# Altium PCB TouchSlider_ESP32_CAP1208.PcbDoc
Units mil, origin at the board's own origin, x right, y up, seen from the top; angles counter-clockwise.
Board outline 2000 x 900 mil, 2 copper layers (Top Layer, Bottom Layer), stack 65.792 mil thick; 26 components, 28 nets, 125 pads, 47 vias.
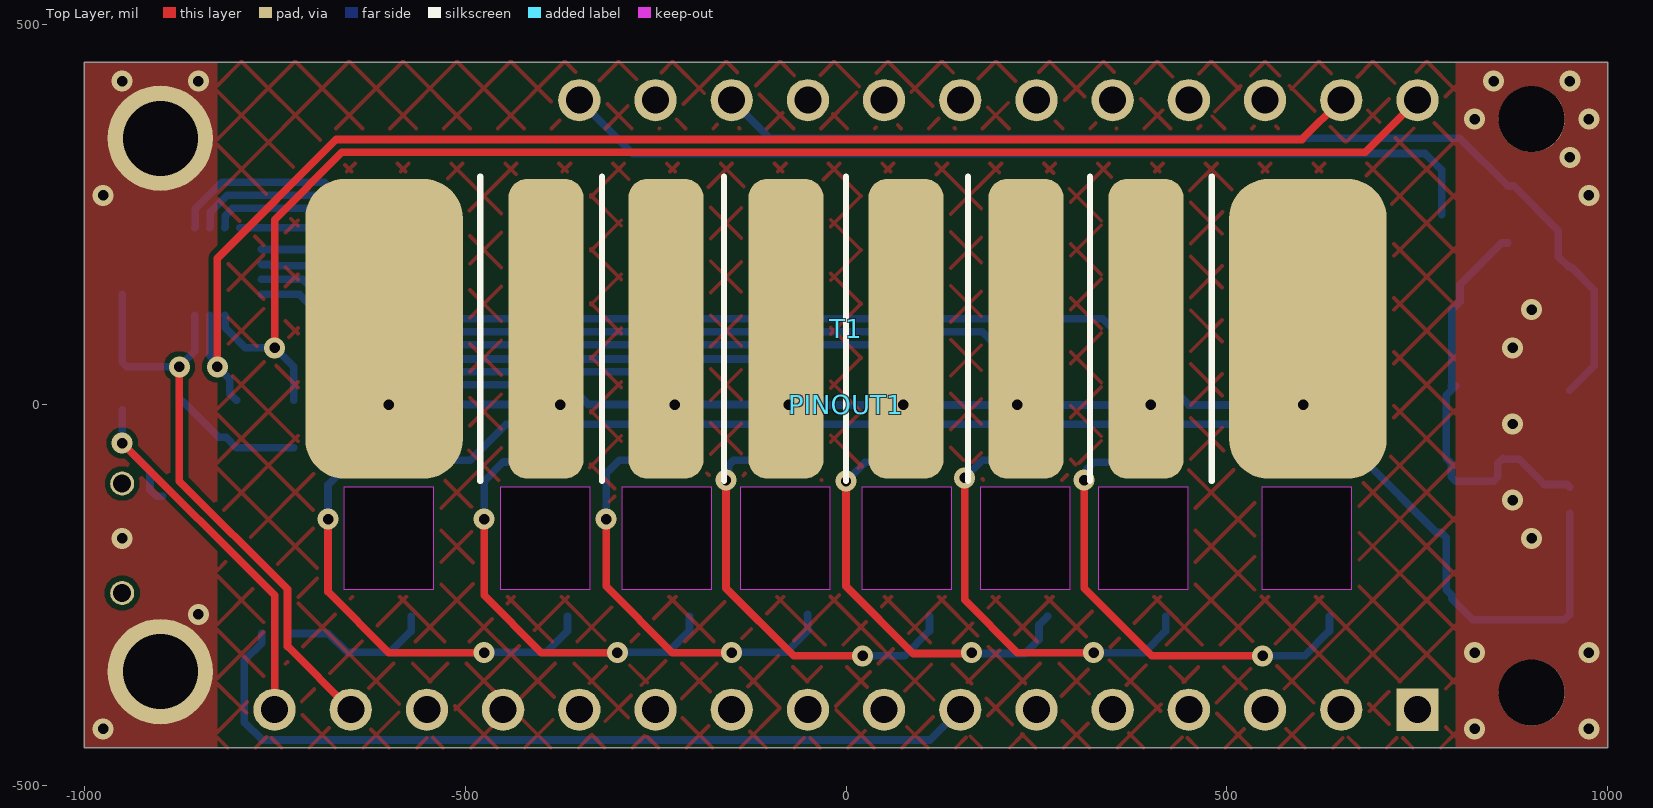
[diagram p0: Top Layer view]
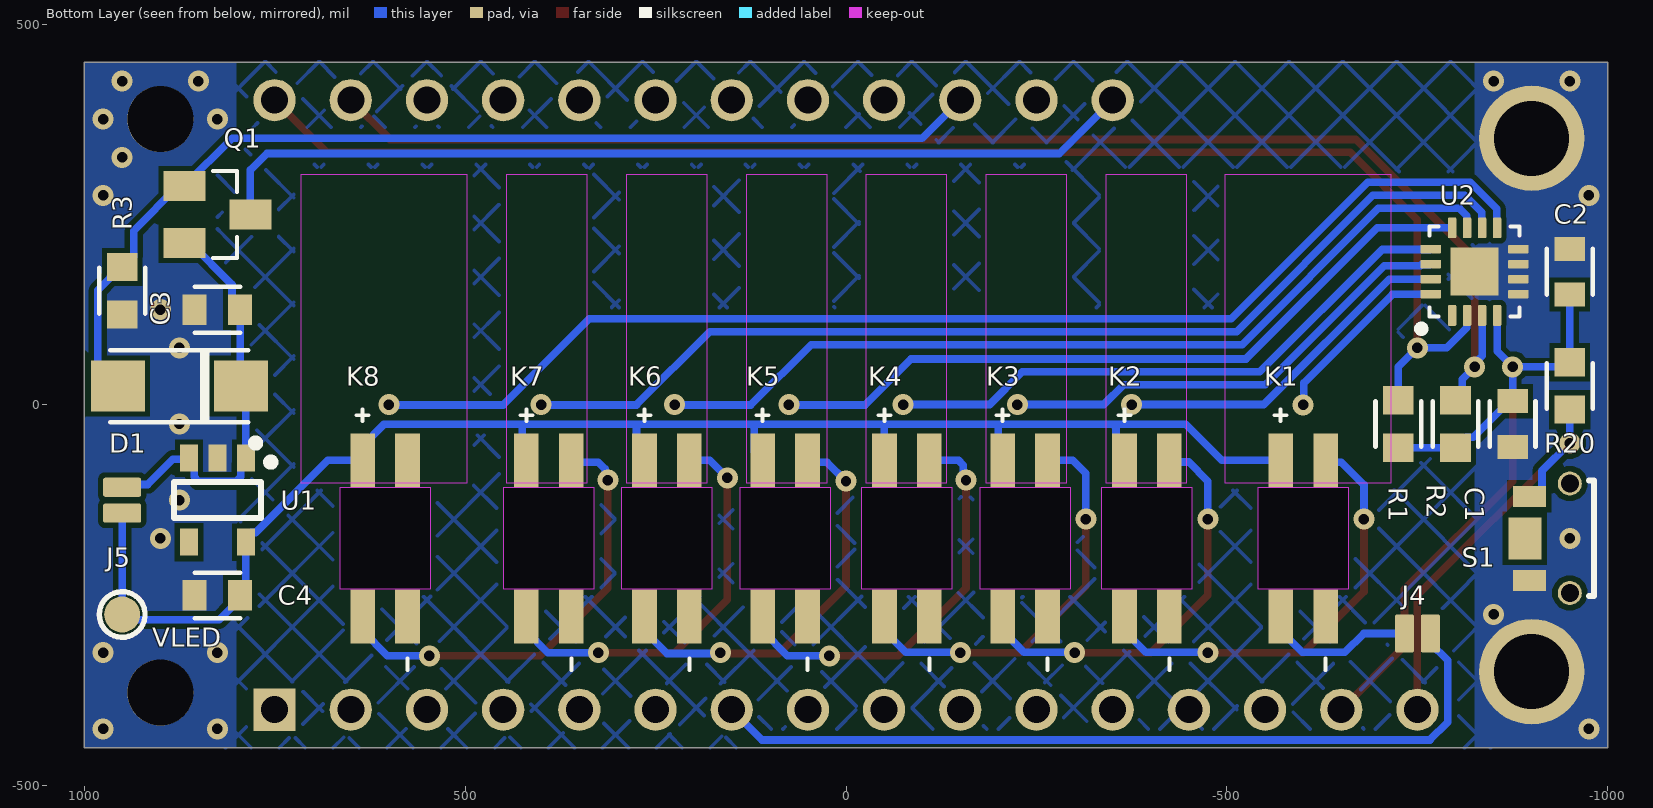
[diagram p1: Bottom Layer view, seen from below]
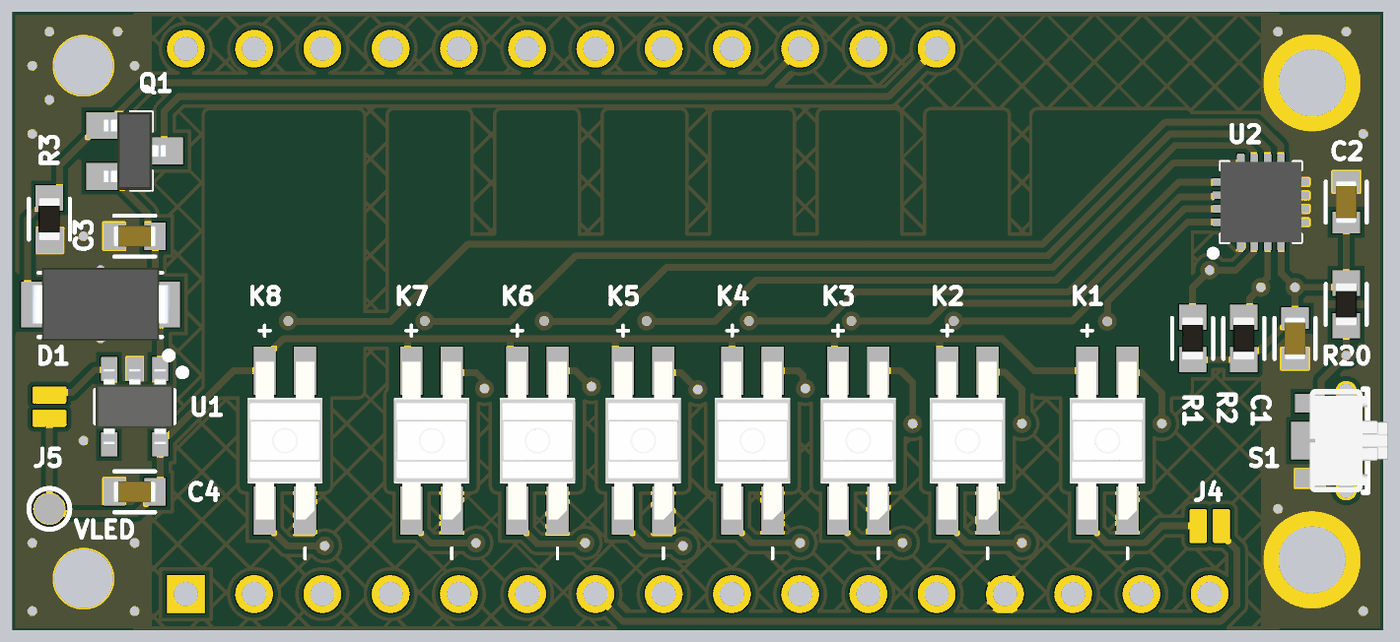
[diagram p2: 3D render of the assembled board from below, using the file's embedded part models]

## Layer stack, top to bottom
Top Solder: solder mask 0.4, Solder Resist, Dk 3.5
Top Layer: signal copper 1.4
Dielectric 1: dielectric 62.9921, FR-4, Dk 4.8
Bottom Layer: signal copper 1.4
Bottom Solder: solder mask 0.4, Solder Resist, Dk 3.5

## Board outline
-1000,-450 1000,-450 1000,450 -1000,450

## Design rules (kind name [scope] priority, off if disabled: settings)
Clearance Clearance_RF [InNetClass('RF')] p1: gap=6 ignorepadtopadclearanceinfootprint=TRUE
Clearance [All] p2: gap=7 ignorepadtopadclearanceinfootprint=TRUE except(0: SMDPad-Hole)
ComponentClearance [All] p1: gap=10 collisioncheckmode=3 verticalgap=10 showdistances=FALSE donotcheckwithout3dbody=TRUE
HoleSize [All] p1: absolutevalues=TRUE maxlimit=200 minlimit=1 maxpercent=80.000 minpercent=20.000
MinimumSolderMaskSliver [All] p1: minsoldermaskwidth=2
PlaneClearance [All] p1: clearance=40
PlaneConnect [All] p1: pad.planeconnectstyle=Direct pad.reliefexpansion=20 pad.reliefentries=4 pad.reliefconductorwidth=10 pad.reliefairgap=10 via.planeconnectstyle=Relief via.reliefexpansion=20 via.reliefentries=4 via.reliefconductorwidth=10 via.reliefairgap=10
PolygonConnect GND_Planes [InNet('GND') vs InPolygonClass('PLANES')] p1: thpad.connectstyle=Direct thpad.reliefconductorwidth=10 thpad.reliefentries=4 thpad.polygonreliefangle="90 Angle" thpad.airgapwidth=10 smdpad.connectstyle=Relief smdpad.reliefconductorwidth=20 smdpad.reliefentries=4 smdpad.polygonreliefangle="90 Angle" smdpad.airgapwidth=10 via.connectstyle=Direct via.reliefconductorwidth=10 via.reliefentries=4 via.polygonreliefangle="90 Angle" via.airgapwidth=10
PolygonConnect [All] p2: connectstyle=Direct reliefconductorwidth=10 reliefentries=4 polygonreliefangle="90 Angle" airgapwidth=10
RoutingVias [All] p1: holewidth=13.78 width=27.56 viastyle="Through Hole" minholewidth=11.81 minwidth=25.59 maxholewidth=19.68 maxwidth=33.46
ShortCircuit "Schematic Short-Circuit Constraint_3" [InComponent('J5')] p1: allowed=TRUE
ShortCircuit "Schematic Short-Circuit Constraint_1" [InComponent('J4')] p2: allowed=TRUE
ShortCircuit [All] p3: allowed=FALSE
SilkToSilkClearance [All] p1: silktosilkclearance=1
SilkToSolderMaskClearance [IsPad] p1: minsilkscreentomaskgap=1 clearancetoexposedcopper=TRUE
SolderMaskExpansion [All] p1: expansion=2 istentingtop=FALSE
Width Width_RF [InNetClass('RF')] p1: maxlimit=38 minlimit=8 preferedwidth=38
Width [All] p2: maxlimit=40 minlimit=8 preferedwidth=10
22 further rules are at their usual default settings.

## Classes and differential pairs
component class Peripherals: C1 C2 K1 K2 K3 K4 K5 K6 K7 K8 PINOUT1 R1 R2 R20 S1 T1 U2
component class Power_Supplies: C3 C4 D1 J4 J5 Q1 R3 U1 VLED

## Components (designator, comment, footprint, x,y, rotation, side; value= is the part's Value field where it differs from the comment)
C1 "100nF/16V" C0603 -875,-25 r270 bottom
C2 "1uF/16V" C0603 -950,175 r90 bottom
C3 "10uF/10V" C0603 825,125 r0 bottom
C4 "10uF/10V" C0603 825,-250 r0 bottom
D1 "40V/1A" SMA-2 875,25 r0 bottom
J4 "SMD NO" JUMPER_SMD_NO -750,-300 r180 bottom net-tie
J5 "SMD NO" JUMPER_SMD_NO 950,-125 r270 bottom net-tie
K1 "NeoPixel Reverse" SK6812-E -600,-175 r90 bottom
K2 "NeoPixel Reverse" SK6812-E -395,-175 r90 bottom
K3 "NeoPixel Reverse" SK6812-E -235,-175 r90 bottom
K4 "NeoPixel Reverse" SK6812-E -80,-175 r90 bottom
K5 "NeoPixel Reverse" SK6812-E 80,-175 r90 bottom
K6 "NeoPixel Reverse" SK6812-E 235,-175 r90 bottom
K7 "NeoPixel Reverse" SK6812-E 390,-175 r90 bottom
K8 "NeoPixel Reverse" SK6812-E 605,-175 r90 bottom
PINOUT1 "Pinout_FeatherESP32" Pinout_FeatherESP32 0,0 r0 top locked
Q1 "1.5A/30V/2V" SOT-23-3 825,250 r270 bottom
R1 "10K" R0603 -725,-25 r90 bottom value=10kR
R2 "10K" R0603 -800,-25 r270 bottom value=10kR
R3 "100K" R0603 950,150 r270 bottom
R20 "100K" R0603 -950,25 r90 bottom
S1 "TL6340AF160Q 0.8mm" TL6340AF160Q -950,-175 r270 bottom
T1 "TOUCH SLIDER 8RECT" "TOUCH SLIDER 8-RECT KEPOUT" 0,100 r90 top locked
U1 "AP2112K-3.3TRG1" SOT-25-5 825,-125 r270 bottom
U2 "CAP1208" QFN16 -825,175 r90 bottom
VLED "Test point 1.2mm" TEST_POINT_1.2MM 950,-275 r90 bottom

## Footprints (in the part's own frame and the unit in brackets; to place one, negate y for a bottom-side part, rotate by r counter-clockwise, add the part's x,y. Pads: shape width x height; smd on the part's side, far side on the other; paste and mask are expansions set on the pad)
C0603 [mm]
  rect 0.8x1.02 smd: 1(-0.759,0) 2(0.759,0)
  silkscreen extent -0.76,-0.76 0.76,0.76, body extent -0.8,-0.4 0.8,0.4, height 0.81
JUMPER_SMD_NO [mil]
  rrect20% 25x50 smd paste-99999: 1(-17,0) 2(17,0)
Pinout_FeatherESP32 [mm]
  rect 1.408x1.408 hole 0.9: 1(19.05,-10.16)
  round 1.408 hole 0.9: 2(16.51,-10.16) 3(13.97,-10.16) 4(11.43,-10.16) 5(8.89,-10.16) 6(6.35,-10.16) 7(3.81,-10.16) 8(1.27,-10.16) 9(-1.27,-10.16) 10(-3.81,-10.16) 11(-6.35,-10.16) 12(-8.89,-10.16) 13(-11.43,-10.16) 14(-13.97,-10.16) 15(-16.51,-10.16) 16(-19.05,-10.16) 17(-8.89,10.16) 18(-6.35,10.16) 19(-3.81,10.16) 20(-1.27,10.16) 21(1.27,10.16) 22(3.81,10.16) 23(6.35,10.16) 24(8.89,10.16) 25(11.43,10.16) 26(13.97,10.16) 27(16.51,10.16) 28(19.05,10.16)
  round 3.516 hole 2.5: P1(-22.86,-8.89) P2(-22.86,8.89)
  round 2.2 hole 2.2 unplated: ""(22.86,-9.588) ""(22.86,9.525)
QFN16 [mm] "QFN16 3x3mm"
  rrect25% 0.69x0.28 smd: 1(-1.46,0.75) 2(-1.46,0.25) 3(-1.46,-0.25) 4(-1.46,-0.75) 9(1.46,-0.75) 10(1.46,-0.25) 11(1.46,0.25) 12(1.46,0.75)
  rrect25% 0.28x0.69 smd: 5(-0.75,-1.46) 6(-0.25,-1.46) 7(0.25,-1.46) 8(0.75,-1.46) 13(0.75,1.46) 14(0.25,1.46) 15(-0.25,1.46) 16(-0.75,1.46)
  rect 1.6x1.6 smd paste-0.2: 17(0,0)
  silkscreen extent -2.02,-1.5 1.5,1.9, body extent -1.5,-1.5 1.5,1.5, height 0.76
R0603 [mm]
  rect 0.94x1.02 smd: 1(-0.79,0) 2(0.79,0)
  silkscreen extent -0.76,-0.76 0.76,0.76, body extent -0.8,-0.4 0.8,0.4, height 0.51
SK6812-E [mm]
  rect 1.8x0.82 smd: 1(2.6,0.75) 2(2.6,-0.75) 3(-2.6,-0.75) 4(-2.6,0.75)
  Keep-Out Layer board cut-out: 1.7,1.5 1.7,-1.5 -1.7,-1.5 -1.7,1.5
  silkscreen extent -4.4,-0.75 4.3,0.95, body extent -2.94,-1.41 2.94,1.39, height 0.95
SMA-2 [mm]
  rect 1.8x1.7 smd: A(2.05,0) K(-2.05,0)
  silkscreen extent -2.67,-1.18 2.31,2.03, body extent -2.6,-1.36 2.6,1.36, height 2.5
SOT-23-3 [mm]
  rect 1x1.4 smd: 1(-0.95,-1.1) 2(0.95,-1.1) 3(0,1.1)
  silkscreen extent -1.45,-0.15 1.45,0.65, body extent -1.45,-1.15 1.45,1.15, height 1.1
SOT-25-5 [mm] "SOT-23-8 Thin, TSOT-23-8"
  rect 0.9x0.6 smd: 1(-1.4,0.95) 2(-1.4,0) 3(-1.4,-0.95) 4(1.4,-0.95) 5(1.4,0.95)
  silkscreen extent -1.4,-1.45 0.6,1.9, body extent -1.4,-1.45 1.4,1.45, height 1.3
TEST_POINT_1.2MM [mm]
  round 1.2 smd paste-0.025: 1(0,0)
  silkscreen extent -0.76,-0.76 0.76,0.76
TL6340AF160Q [mm]
  rect 0.7x1.1 smd: 1(-1.4,-1.35) 2(1.4,-1.35)
  round 0.8 hole 0.6 mask+0: SH1(-1.825,0) SH2(1.825,0)
  rect 1.4x1.1 smd: SH3(0,-1.5)
  silkscreen extent -1.92,0.63 1.92,0.8, body extent -1.92,-1.35 1.92,1.55, height 1.55
"TOUCH SLIDER 8-RECT KEPOUT" [mm]
  rrect50% 10x5.25 smd mask+0.102: 1(0,15.4) 8(0,-15.4)
  rrect50% 10x2.5 smd mask+0.102: 2(0,10) 3(0,6) 4(0,2) 5(0,-2) 6(0,-6) 7(0,-10)
  Bottom Layer keep-out region: -5.144,18.162 -5.144,12.638 5.143,12.638 5.143,18.162
  Bottom Layer keep-out region: -5.144,-12.638 -5.144,-18.163 5.143,-18.163 5.143,-12.638
  Bottom Layer keep-out region: -5.144,11.35 -5.144,8.683 5.143,8.683 5.143,11.35
  Bottom Layer keep-out region: -5.143,-8.65 -5.143,-11.317 5.144,-11.317 5.144,-8.65
  Bottom Layer keep-out region: -5.143,-4.65 -5.143,-7.317 5.144,-7.317 5.143,-4.65
  Bottom Layer keep-out region: -5.144,7.35 -5.143,4.683 5.143,4.683 5.143,7.35
  Bottom Layer keep-out region: -5.143,3.35 -5.143,0.683 5.143,0.683 5.143,3.35
  Bottom Layer keep-out region: -5.143,-0.65 -5.143,-3.317 5.143,-3.317 5.143,-0.65
  silkscreen extent -5.08,-12.19 5.08,12.19

## Part data
C1: library part "C0603 100nF/16V", "MLCC 0603 100nF 16V 10% X5R", Capacitance=100nF, Case Code (Imperial)=0603, Case Code (Metric)=1608, Dielectric=X5R, Manufacturer 1="Kyocera AVX", Manufacturer Part Number 1=0603YD104KAT2A, Max Operating Temperature=85°C, Min Operating Temperature=-55°C, Package Quantity=4000, Supplier Part Number 1=581-0603YD104KAT2A, Tolerance=10%, Voltage Rating=16V, Case/Package=0603, Category="Ceramic Capacitors", Depth=0.81mm, Height=0.9mm, Lead Free="Lead Free", Length=1.6mm, Mount="Surface Mount", Number of Pins=2, Packaging="Tape and Reel", Pricing 1="1=0.26000, 10=0.11400, 50=0.11400, 100=0.09700, 1000=0.05900, 10000=0.04800 (USD)", RoHS=Yes, Stock 1=3315, Supplier 1=Mouser, Termination=SMD/SMT, Thickness=0.035inch, Voltage Rating (DC)=16V, Width=0.81mm
C2: library part "C0603 1uF/16V", "MLCC 0603 1uF 16V 10% X5R", Capacitance=1uF, Case Code (Imperial)=0603, Case Code (Metric)=1608, Dielectric=X5R, Manufacturer 1=Yageo, Manufacturer Part Number 1=CC0603KRX5R7BB105, Max Operating Temperature=85°C, Min Operating Temperature=-55°C, Package Quantity=4000, Resistor Type=Ceramic, Supplier Part Number 1=603-CC603KRX5R7BB105, Tolerance=10%, Voltage Rating=16V, Case/Package=0603, Category="Ceramic Capacitors", Construction=Flat, Depth=0.8mm, Dissipation Factor=7%, Halogen Free="Halogen Free", Height=0.8mm, Lead Free="Lead Free", Length=1.6mm, Mount="Surface Mount", Number of Pins=2, Packaging="Tape and Reel", Pricing 1="1=0.17000, 10=0.09100, 50=0.09100, 100=0.04100, 1000=0.03400, 10000=0.02100 (USD)", Radiation Hardening=No, REACH SVHC=Unknown, RoHS=Yes, RoHS Compliant=Yes, Series=CC, Stock 1=726921, Supplier 1=Mouser, Termination=SMD/SMT, Thickness=0.035inch, Voltage Rating (DC)=16V, Width=0.8mm
C3 C4: library part "C0603 10uF/10V", "MLCC 10uF 10V X5R 20% 0603", Manufacturer=Samsung, Manufacturer Part Number=CL10A106MP8NNND, Supplier Part Number 1=187-CL10A106MP8NNND, Category="Ceramic Capacitors", Pricing 1="1=0.20000, 10=0.14000, 50=0.14000, 100=0.06600, 1000=0.03900, 10000=0.03000 (USD)", RoHS=Yes, RoHS Compliant=Yes, Stock 1=58774, Supplier 1=Mouser, Supplier 2=Mouser, Supplier Part Number 2=963-LMK107BBJ106MAHT
D1: library part SS14, "SS14 Series 500 mV 1 A 40 V Max Reverse Voltage Schottky Rectifier - DO-214AC", Average Rectified Current=1A, Case/Package=DO-214AC, Forward Voltage=500mV, Manufacturer="ON Semiconductor / Fairchild", Max Forward Surge Current (Ifsm)=40A, Max Operating Temperature=125°C, Max Repetitive Reverse Voltage (Vrrm)=40V, Max Reverse Current=200uA, Min Operating Temperature=-65°C, Package Quantity=7500, Supplier Part Number 1=512-SS14, Category="Schottky Diodes", ComponentLink1Description=https://datasheet.ciiva.com/4713/ss14-197224-4713938.pdf?src-supplier=Mouser, ComponentLink1URL=https://datasheet.ciiva.com/4713/ss14-197224-4713938.pdf?src-supplier=Mouser, ComponentLink2Description=https://datasheet.ciiva.com/7965/1766303-7965241.pdf?src-supplier=Element14, ComponentLink2URL=https://datasheet.ciiva.com/7965/1766303-7965241.pdf?src-supplier=Element14, ComponentLink3Description=https://datasheet.ciiva.com/22651/1880990-22651980.pdf?src-supplier=Element14, ComponentLink3URL=https://datasheet.ciiva.com/22651/1880990-22651980.pdf?src-supplier=Element14, ComponentLink4Description=https://datasheet.ciiva.com/8303/ss19-8303766.pdf?src-supplier=Avnet, ComponentLink4URL=https://datasheet.ciiva.com/8303/ss19-8303766.pdf?src-supplier=Avnet, ComponentLink5Description=https://datasheet.ciiva.com/910/ss12-910696.pdf?src-supplier=Digikey, ComponentLink5URL=https://datasheet.ciiva.com/910/ss12-910696.pdf?src-supplier=Digikey, ComponentLink6Description=https://datasheet.ciiva.com/910/ss12-910697.pdf?src-supplier=Digikey, ComponentLink6URL=https://datasheet.ciiva.com/910/ss12-910697.pdf?src-supplier=Digikey, ComponentLink7Description=https://datasheet.ciiva.com/910/ss12-910695.pdf?src-supplier=Digikey, ComponentLink7URL=https://datasheet.ciiva.com/910/ss12-910695.pdf?src-supplier=Digikey, Current=1A, Current Rating=1A, Forward Current=1A, Height=2.2mm, Length=4.75mm, Manufacturer Part Number=SS14, Max Reverse Voltage (DC)=40V, Mount="Surface Mount", Number of Pins=2, Output Current=1A, Packaging="Tape and Reel", Peak Non-Repetitive Surge Current=40A, Polarity=Standard, Pricing 1="1=0.37, 10=0.261, 50=0.261, 100=0.117, 1000=0.082, 10000=0.075 (USD)", Radiation Hardening=No, Reach SVHC Compliant=No, RoHS=Yes, RoHS Compliant=Yes, Series=-, Stock 1=331320, Supplier 1=Mouser, Termination=SMD/SMT, Voltage=40V, Voltage Rating (DC)=40V, Weight=0.003739oz, Width=2.95mm
J4 J5: library part JUMPER_SMD_NO, Rule="Short-Circuit Constraint [Short Circuit - Allowed]"
K1 K2 K3 K4 K5 K6 K7 K8: library part SK6812-E, "NeoPixel Reverse Mount RGB LEDs - SK6812-E", Manufacturer 1="Adafruit Industries", Manufacturer Part Number 1=4960, Supplier Part Number 1=485-4960, Pricing 1="1=2.95, 10=2.95, 50=2.95, 100=2.95, 1000=2.95, 10000=2.95 (USD)", RoHS=No, Supplier 1=Mouser, Supplier 2=LCSC, Supplier Part Number 2=C5149201
PINOUT1: "Breadboard, Prepunched Insulating Non-Plated Through Hole (NPTH) 0.100 (2.54mm)", Package=None, Arrow_Electronics-Purchase-URL=https://snapeda.com/shop?store=Arrow+Electronics&id=1260737, Availability=Warning, MF="Keystone Electronics", Mouser-Purchase-URL=https://snapeda.com/shop?store=Mouser&id=1260737, MP=3405, Price=None, SnapEDA_Link=https://www.snapeda.com/parts/3405/Keystone%20Electronics/view-part/1260737/?ref=snap
Q1: library part "MOSFET P-CH 30V/1.5A BSS314", "MOSFET P-Ch -30V -1.5A SOT-23-3", Manufacturer=Infineon, Manufacturer Part Number=BSS314PE, Supplier Part Number 1=726-BSS314PEH6327, Halogen Free="Halogen Free", Number of Pins=3, Packaging="Tape and Reel", Pricing 1="1=0.46000, 10=0.34700, 50=0.34700, 100=0.21700, 500=0.14800, 1000=0.11400, 3000=0.10200, 6000=0.09600, 9000=0.09400, 10000=0.09400 (USD)", RoHS=Yes, RoHS Compliant=Yes, Stock 1=2505, Supplier 1=Mouser, Supplier 2=Mouser, Supplier Part Number 2=726-BSS314PEH6327XTS
R1 R2: library part "R0603 10K", "SMD Chip Resistor, 10 kOhm, ± 1%, 100 mW, 0603 [1608 Metric], Thick Film, Anti-Sulfur", Case Code (Imperial)=0603, Case Code (Metric)=1608, Manufacturer 1=Yageo, Manufacturer Part Number 1=AF0603FR-0710KL, Max Operating Temperature=155°C, Max Power Dissipation=100mW, Min Operating Temperature=-55°C, Package Quantity=1, Supplier Part Number 1=603-AF0603FR-0710KL, Temperature Coefficient=100ppm/°C, Tolerance=1%, Voltage Rating=50V, Case/Package=0603, Category="Chip SMD Resistors", Features="Moisture Resistant,Anti-Sulfur", Height=0.022inch, Lead Free=5697LeadFree, Length=0.063inch, Number of Terminations=2, Packaging="Tape and Reel", Power Rating=100mW, Pricing 3="5000=0.00223, 10000=0.00219, 20000=0.00213 (USD)", RoHS=Yes, RoHS Compliant=Yes, Series=AF, Stock 3=5000, Supplier 1=Mouser, Supplier 2=Mouser, Supplier Part Number 2=667-ERJ-3EKF1002V, Termination=SMD/SMT, Width=0.031inch
R3: library part "R0603 100K", "RES 0603 100K OHM 1% 1/10W", Case Code (Imperial)=0603, Case Code (Metric)=1608, Manufacturer=Yageo, Manufacturer Part Number=RC0603FR-07100KL, Max Operating Temperature=155°C, Min Operating Temperature=-55°C, Power Rating=100mW, Resistance=100kR, Resistor Type="Thick Film", Supplier Part Number 1=603-RC0603FR-07100KL, Temperature Coefficient=100ppm/°C, Tolerance=1%, Voltage Rating=50V, Working Voltage=75V, Case/Package=0603, Category="Chip SMD Resistors", Depth=0.8mm, Height=0.45mm, Lead Free="Lead Free", Length=1.6mm, Military Standard=Not, Number of Pins=2, Number of Terminations=2, Packaging="Tape and Reel", Pricing 1="1=0.10000, 10=0.02100, 100=0.00900, 1000=0.00400, 5000=0.00300, 10000=0.00200 (USD)", REACH SVHC="No SVHC", RoHS=Yes, Stock 1=4536807, Supplier 1=Mouser, Termination=SMD/SMT, Voltage Rating (DC)=50V, Width=0.8mm
R20: library part "R0603 100K", "RES 0603 100K OHM 1% 1/10W", Case Code (Imperial)=0603, Case Code (Metric)=1608, Manufacturer 1=Yageo, Manufacturer Part Number 1=RC0603FR-07100KL, Max Operating Temperature=155°C, Min Operating Temperature=-55°C, Power Rating=100mW, Resistance=100kR, Resistor Type="Thick Film", Supplier Part Number 1=603-RC0603FR-07100KL, Temperature Coefficient=100ppm/°C, Tolerance=1%, Voltage Rating=50V, Working Voltage=75V, Case/Package=0603, Category="Chip SMD Resistors", Depth=0.8mm, Height=0.45mm, Lead Free="Lead Free", Length=1.6mm, Military Standard=Not, Number of Pins=2, Number of Terminations=2, Packaging="Tape and Reel", Pricing 1="1=0.10000, 10=0.02100, 100=0.00900, 1000=0.00400, 5000=0.00300, 10000=0.00200 (USD)", REACH SVHC="No SVHC", RoHS=Yes, Stock 1=4536807, Supplier 1=Mouser, Termination=SMD/SMT, Voltage Rating (DC)=50V, Width=0.8mm
S1: "TACTILE SWITCH, SPST, 0.02A/12VDC, SMD; Product Range: TL6340 Series; Actuator Orientation: Side Actuated; Switch...", Manufacturer=E-Switch, Manufacturer Part Number=TL6340AF160Q, Supplier Part Number 1=612-TL6340AF160QG, Category="Tactile Switches", Parameter 1=$0.36, Pricing 1="1=0.51, 10=0.478, 50=0.478, 100=0.46, 1000=0.36, 10000=0.255 (USD)", RoHS=Yes, Stock 1=2636, Supplier 1=Mouser, Supplier 2=LCSC, Supplier Part Number 2=C4944967
T1: "8-Segment touch slider"
U1: "IC REG LINEAR 3.3V 600MA SOT25", Case/Package=SOT-23-5, Dropout Voltage=250mV, Manufacturer=Diodes, Max Input Voltage=6V, Max Operating Temperature=85°C, Max Output Current=600mA, Min Input Voltage=2.5V, Min Operating Temperature=-40°C, Output Voltage=3.3V, Package Quantity=1, Quiescent Current=55uA, Supplier Part Number 1=621-AP2112K-3.3TRG1, Accuracy=1.5%, Category="Voltage Regulators - Linear", ComponentLink1Description=https://datasheet.ciiva.com/29569/ap2112-29569917.pdf?src-supplier=Digi-Key, ComponentLink1URL=https://datasheet.ciiva.com/29569/ap2112-29569917.pdf?src-supplier=Digi-Key, ComponentLink2Description=https://datasheet.ciiva.com/29569/ap2112-29569918.pdf?src-supplier=Digi-Key, ComponentLink2URL=https://datasheet.ciiva.com/29569/ap2112-29569918.pdf?src-supplier=Digi-Key, ComponentLink3Description=https://datasheet.ciiva.com/29569/ap2112-29569919.pdf?src-supplier=Digi-Key, ComponentLink3URL=https://datasheet.ciiva.com/29569/ap2112-29569919.pdf?src-supplier=Digi-Key, ComponentLink4Description=https://datasheet.ciiva.com/30016/ap2112-30016792.pdf?src-supplier=Avnet, ComponentLink4URL=https://datasheet.ciiva.com/30016/ap2112-30016792.pdf?src-supplier=Avnet, Height=1.3mm, Lead Free="Lead Free", Length=3.1mm, Manufacturer Part Number=AP2112K-3.3TRG1, Mount="Surface Mount", Number of Outputs=1, Number of Pins=5, Number of Regulators=1, Output Current=600mA, Output Type=Fixed, Packaging="Tape and Reel", Polarity=Positive, Pricing 1="1=0.47000, 10=0.31700, 50=0.31700, 100=0.15000, 1000=0.11600, 10000=0.08900 (USD)", RoHS=Yes, RoHS Compliant=Yes, Stock 1=4864, Supplier 1=Mouser, Width=1.7mm
U2: "CAP1208 Series 8-Channel Capacitive Touch Surface Mount Proximity - QFN-16", Case/Package=QFN, Manufacturer=Microchip, Manufacturer Part Number=CAP1208-1-A4-TR, Max Operating Temperature=125°C, Max Supply Voltage=5.5V, Min Operating Temperature=-40°C, Min Supply Voltage=3V, Operating Supply Current=500uA, Operating Supply Voltage=5V, Package Quantity=5000, Supplier Part Number 1=579-CAP1208-1-A4-TR, Category="Touch Screen Controllers", ComponentLink1Description=https://datasheet.ciiva.com/28419/1772686-28419124.pdf?src-supplier=Element14, ComponentLink1URL=https://datasheet.ciiva.com/28419/1772686-28419124.pdf?src-supplier=Element14, ComponentLink2Description=https://datasheet.ciiva.com/29355/filehandler-aspxddocname-en566275-29355120.pdf?src-supplier=Digi-Key, ComponentLink2URL=https://datasheet.ciiva.com/29355/filehandler-aspxddocname-en566275-29355120.pdf?src-supplier=Digi-Key, ComponentLink3Description=https://datasheet.ciiva.com/24141/00001570a-278059-24141215.pdf?src-supplier=Mouser, ComponentLink3URL=https://datasheet.ciiva.com/24141/00001570a-278059-24141215.pdf?src-supplier=Mouser, ComponentLink4Description=https://datasheet.ciiva.com/29895/00001570a-29895445.pdf?src-supplier=Avnet, ComponentLink4URL=https://datasheet.ciiva.com/29895/00001570a-29895445.pdf?src-supplier=Avnet, ComponentLink5Description=https://datasheet.ciiva.com/39123/594000001570b-39123436.pdf?src-supplier=Onlinecomponents.com, ComponentLink5URL=https://datasheet.ciiva.com/39123/594000001570b-39123436.pdf?src-supplier=Onlinecomponents.com, Interface=I2C,SMBus, Length=3mm, Mounting Technology="Surface Mount", Number of Channels=8, Number of Inputs=8, Packaging="Tape and Reel", Pins=16, Pricing 1="1=1.04, 10=1.04, 50=1, 100=0.93, 1000=0.93, 10000=0.929 (USD)", Reach SVHC Compliant=No, RoHS=Yes, RoHS Compliant=Yes, Series=-, Stock 1=19733, Supplier 1=Mouser, Supplier 2=Digi-Key, Supplier Part Number 2=CAP1208-1-A4-TRCT-ND, Supply Current=500uA, Termination=SMD/SMT, Touchscreen=Capacitive, Width=3mm
VLED: library part "Test point", "SMD test point"

## Via types
v1: diameter 27.56, hole 13.78, Top Layer to Bottom Layer, tented both sides, 47 vias

## Nets (pads, with @x,y where several pads share a name; then routed paths per layer and width w, separated by ;. In a path a pad name is that pad's centre, name@x,y a point inside that pad or via, vN(x,y) a via of type N, cw(c..) or ccw(c..) an arc to the next point about the centre after c; other vN are vias at no path point)
3.3V: C1.1 C2.1 PINOUT1.15 R1.1 R2.2 R20.2 U2.4 | length 1006.1
  Top Layer w10: v1(-875,50) -875,-100 -733,-242 -733,-317 PINOUT1.15
  Bottom Layer w10: C2.1 R20.2 -943.9,50 v1(-875,50) ; U2.4 -854.53,70.47 v1(-875,50) ; R1.1 R2.2 -813.5,-42.6 -823.19,-42.6 -870.67,4.88 C1.1 v1(-875,50)
GND: C1.2 C2.2 C3.2 C4.2 K1.3 K2.3 K3.3 K4.3 K5.3 K6.3 K7.3 K8.3 PINOUT1. PINOUT1.13 PINOUT1.P1 PINOUT1.P2 R3.2 S1.2 U1.2 U2.1 U2.5 U2.6 U2.7 U2.8 U2.17
  other v1: -975,-425 825,-425 975,-425 825,-325 975,-325 -850,-275 -950,-175 900,-175 875,-125 875,-25 875,75 900,125 -975,275 975,275 950,325 825,375 975,375 -950,425 -850,425 850,425 950,425
NetJ4_1: J4.1 K1.4 | length 203.7
  Bottom Layer w10: J4.1 -679.36,-300 -654.56,-324.8 -598.61,-324.8 -570.47,-296.65 K1.4
NetJ4_2: J4.2 PINOUT1.7 | length 1091.7
  Bottom Layer w10: J4.2 -767,-312.5 -789.72,-335.22 -789.72,-416.45 -766.45,-439.72 110.28,-439.72 PINOUT1.7
NetK1_2: K1.2 K2.4 | length 582.4
  Top Layer w10: v1(-679.83,-150) -679.83,-245.17 -600,-325 v1(-475,-325)
  Bottom Layer w10: v1(-679.83,-150) -679.83,-104.83 -650,-75 -631.89,-75 K1.2 ; v1(-475,-325) -474.8,-324.8 -393.61,-324.8 -365.47,-296.65 K2.4
NetK2_2: K2.2 K3.4 | length 543.4
  Top Layer w10: v1(-475,-150) -475,-250 -400,-325 v1(-300,-325)
  Bottom Layer w10: v1(-475,-150) -475,-100 -449.81,-74.81 -426.7,-74.81 K2.2 ; v1(-300,-325) -299.8,-324.8 -233.61,-324.8 -205.47,-296.65 K3.4
NetK3_2: K3.2 K4.4 | length 551
  Top Layer w10: v1@-306.06,-150 v1(-314.83,-150) -314.83,-238.12 -227.95,-325 v1(-150,-325)
  Bottom Layer w10: v1(-314.83,-150) -314.83,-89.83 -297.64,-72.64 K3.2 ; v1(-150,-325) -149.8,-324.8 -78.61,-324.8 -50,-296.18 -50,-275 -50.47,-275.47 K4.4
NetK4_2: K4.2 K5.4 | length 546.7
  Top Layer w10: v1(-157.5,-98.5) -157.5,-240.45 -68.65,-329.3 v1(21.71,-329.3)
  Bottom Layer w10: v1(-157.5,-98.5) -154.14,-95.14 -154.14,-79.14 -147.64,-72.64 K4.2 ; v1(21.71,-329.3) 76.88,-329.3 109.53,-296.65 K5.4
NetK5_2: K5.2 K6.4 | length 533.5
  Top Layer w10: v1(0,-100) 0,-237.95 88.31,-326.27 163.73,-326.27 v1(165,-325)
  Bottom Layer w10: v1(0,-100) 25,-75 48.11,-75 K5.2 ; v1(165,-325) 166.27,-326.27 234.91,-326.27 253.39,-307.8 253.39,-288.5 K6.4
NetK6_2: K6.2 K7.4 | length 542.8
  Top Layer w10: v1(155.78,-95.74) 155.78,-255.78 225,-325 v1(325,-325)
  Bottom Layer w10: v1(155.78,-95.74) 178.88,-72.64 K6.2 ; v1(325,-325) 391.18,-325 419.53,-296.65 K7.4
NetK7_2: K7.2 K8.4 | length 598.7
  Top Layer w10: v1(312.5,-98.5) 312.5,-240.45 401.35,-329.3 v1(546.71,-329.3)
  Bottom Layer w10: v1(312.5,-98.5) 315.86,-95.14 315.86,-84.14 325,-75 349.33,-75 351.69,-72.64 K7.2 ; v1(546.71,-329.3) 601.88,-329.3 634.53,-296.65 K8.4
NetPINOUT1_11: PINOUT1.11
NetPINOUT1_12: PINOUT1.12
NetPINOUT1_16: PINOUT1.16 R20.1 S1.1 | length 573.2
  Top Layer w10: v1(-950,-50) -750,-250 PINOUT1.16
  Bottom Layer w10: R20.1 v1(-950,-50) -913.5,-86.5 -913.5,-111.1 -904.72,-119.88 S1.1
NetPINOUT1_27: PINOUT1.27 R2.1 U2.3 | length 1829.1
  Top Layer w10: v1(-825,50) -825,192.24 -668.81,348.43 598.43,348.43 PINOUT1.27
  Bottom Layer w10: U2.3 -834.84,64.59 -825,54.75 v1(-825,50) -808.75,33.75 -808.75,14.85 R2.1
NetPINOUT1_28: PINOUT1.28 R1.2 U2.2 | length 1904.3
  Top Layer w10: v1(-750,75) -750,243.2 -661.77,331.43 681.43,331.43 PINOUT1.28
  Bottom Layer w10: U2.2 -814.65,117.01 -814.65,101.44 -788.21,75 v1(-750,75) -725,50 R1.2
NetT1_1: T1.1 U2.16 | length 244.3
  Bottom Layer w10: U2.16 -717.33,145.47 -600.64,28.78 -600.64,0.64 v1(-600,0)
NetT1_2: T1.2 U2.15 | length 460.7
  Bottom Layer w10: U2.15 -712.97,165.16 -548.39,0.57 v1(-375,0.57)
NetT1_3: T1.3 U2.14 | length 618.8
  Bottom Layer w10: U2.14 -767.01,184.33 -755.79,184.33 -754.13,182.67 -706.44,182.67 -550.13,26.35 -364.32,26.35 -338.54,0.57 v1(-225,0.57)
NetT1_4: T1.4 U2.13 | length 777
  Bottom Layer w10: U2.13 -767.01,204.02 -703.75,204.02 -543.09,43.35 -231.32,43.35 -188.54,0.57 v1(-75,0.57)
NetT1_5: T1.5 U2.12 | length 967
  Bottom Layer w10: U2.12 -697.13,232.48 -525,60.35 -85.35,60.35 -25,0 74.43,0 v1(75,0.57)
NetT1_6: T1.6 U2.11 | length 1167.6
  Bottom Layer w10: U2.11 -814.65,232.99 -814.65,248.56 -805.15,258.06 -698.67,258.06 -519.82,79.22 45.78,79.22 125,0 224.43,0 v1(225,0.57) v1@225,0
NetT1_7: T1.7 U2.10 | length 1378.3
  Bottom Layer w10: U2.10 -834.33,232.99 -834.33,252.92 -812.19,275.06 -691.63,275.06 -512.78,96.22 178.78,96.22 275,0 399.43,0 v1(400,0.57)
NetT1_8: T1.8 U2.9 | length 1614.6
  Bottom Layer w10: U2.9 -854.02,232.99 -854.02,257.28 -819.23,292.06 -684.58,292.06 -505.74,113.22 336.78,113.22 450,0 599.43,0 v1(600,0.57)
VBAT: PINOUT1.17 Q1.3 | length 1228
  Bottom Layer w10: PINOUT1.17 -280,330 760,330 781.69,308.31 Q1.3
VCC: C3.1 D1.K J5.1 Q1.2 U1.1 U1.3 | length 552.3
  Bottom Layer w10: Q1.2 860.43,212.6 805.87,158.03 805.87,135.75 C3.1 795.12,25.83 D1.K 800,25 787.6,12.6 U1.1 794.41,-76.69 794.41,-94.14 800.27,-100 850,-100 855.59,-94.41 855.59,-76.69 U1.3 863.83,-71.31 883.35,-71.31 916.4,-104.35 946.35,-104.35 J5.1
VLED: C4.1 J5.2 K1.1 K2.1 K3.1 K4.1 K5.1 K6.1 K7.1 K8.1 U1.5 VLED.1 | length 2142.8
  Bottom Layer w10: K1.1 -493.07,-72.64 -445.64,-25.2 -350,-25.2 ; K2.1 -354.33,-61.5 -354.33,-29.54 -350,-25.2 ; K3.1 -205.47,-55.47 -200,-50 -200,-25.2 ; K4.1 -50.47,-50.47 -50,-50 -50,-25.2 ; K5.1 120.67,-61.5 120.67,-29.54 125,-25.2 ; K6.1 275,-62.17 275,-25.2 ; K7.1 425,-67.17 425,-25.2 ; J5.2 VLED.1 942.92,-282.08 822.87,-282.08 795.12,-254.33 C4.1 787.6,-242.48 U1.5 787.6,-174.21 780.79,-167.4 774.88,-167.4 680.12,-72.64 K8.1 634.53,-53.35 606.39,-25.2 425,-25.2 ; -350,-25.2 -200,-25.2 ; -200,-25.2 -50,-25.2 ; -50,-25.2 125,-25.2 ; 125,-25.2 275,-25.2 ; 275,-25.2 425,-25.2
VUSB: D1.A PINOUT1.19 Q1.1 R3.1 | length 1399.9
  Bottom Layer w10: PINOUT1.19 -100,350 805.71,350 Q1.1 876.18,287.4 934.92,228.66 934.92,194.61 948.43,181.1 R3.1 951.57,181.1 982.08,150.6 982.08,51.37 D1.A D1.A@950,19.29
pads on no net: K8.2 PINOUT1.1 PINOUT1.2 PINOUT1.3 PINOUT1.4 PINOUT1.5 PINOUT1.6 PINOUT1.8 PINOUT1.9 PINOUT1.10 PINOUT1.14 PINOUT1.18 PINOUT1.20 PINOUT1.21 PINOUT1.22 PINOUT1.23 PINOUT1.24 PINOUT1.25 PINOUT1.26 S1.SH1 S1.SH2 S1.SH3 U1.4

## Polygon pours and split planes (outlines as drawn)
GND on Top Layer "VUSB_TOP" (solid, remove dead copper, pour order 5): -1000,450 -825,450 -825,-450 -1000,-450 -825,-450 -1000,-450
GND on Top Layer "VUSB_TOP" (solid, remove dead copper, pour order 3): 800,450 800,-450 1000,-450 1000,450
GND on Top Layer "GND" (hatched 45Degree grid 50 track 5, remove dead copper, pour order 0): -825,-450 800,-450 800,450 -825,450
GND on Bottom Layer "VUSB_TOP" (solid, remove dead copper, pour order 4): -1000,450 -825,450 -825,-450 -1000,-450 -825,-450 -1000,-450
GND on Bottom Layer "VUSB_TOP" (solid, remove dead copper, pour order 2): 800,450 800,-450 1000,-450 1000,450
GND on Bottom Layer "GND" (hatched 45Degree grid 50 track 5, remove dead copper, pour order 1): -850,-450 825,-450 825,450 -850,450

## Silkscreen, mask and mechanical layers (free items; w line width, h text height)
Board Shape (Mech3):
  the board outline again, w8